# Altium PCB ctrl_lumier_pcb_backup.PcbDoc
Units mil, origin at the board's own origin, x right, y up, seen from the top; angles counter-clockwise.
Board outline 3525 x 2000 mil, 2 copper layers (Top Layer, Bottom Layer); 32 components, 42 nets, 150 pads, 42 vias.
Unrouted connection lines stored in the file: 21.
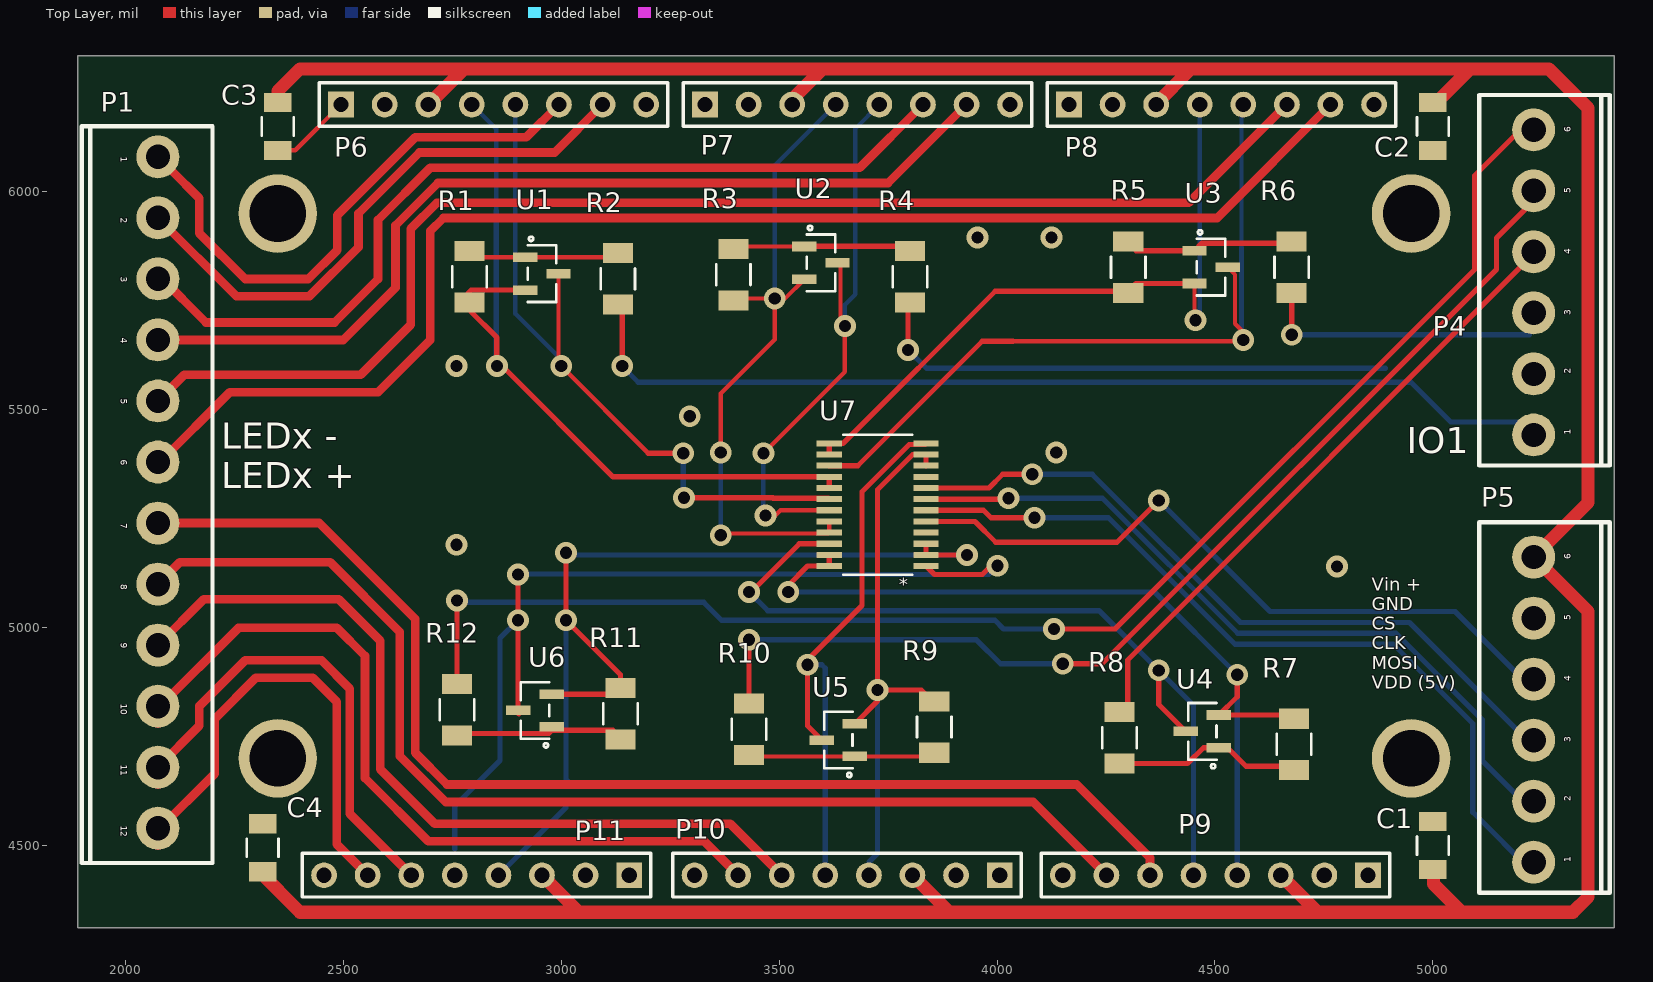
[diagram p0: Top Layer view]
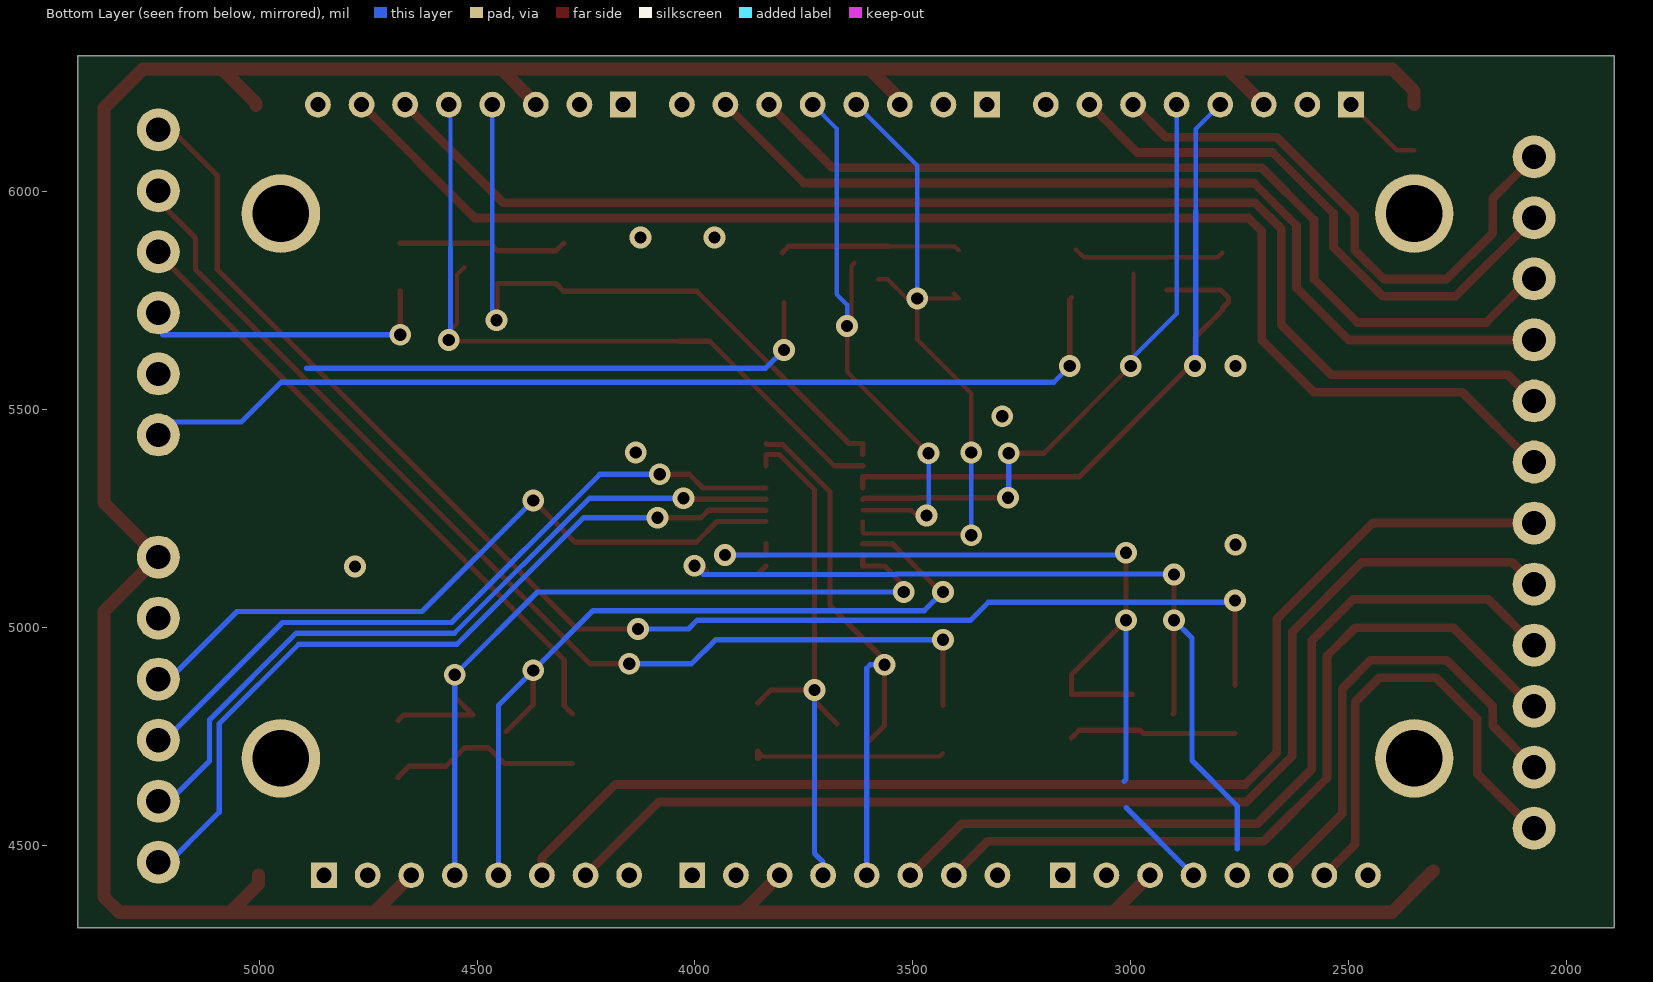
[diagram p1: Bottom Layer view, seen from below]

## Layer stack, top to bottom
Top Solder: solder mask 0.4, Solder Resist, Dk 3.5
Top Layer: signal copper 1.4
Dielectric 1: dielectric 12.6, FR-4, Dk 4.8
Bottom Layer: signal copper 1.4
Bottom Solder: solder mask 0.4, Solder Resist, Dk 3.5

## Board outline
1891,4312 1891,6312 5416,6312 5416,4312

## Design rules (kind name [scope] priority, off if disabled: settings)
Clearance [All] p1: gap=10 ignorepadtopadclearanceinfootprint=FALSE
ComponentClearance [All] p1: gap=0 collisioncheckmode=3 verticalgap=0 showdistances=FALSE
HoleSize [All] p1: absolutevalues=TRUE maxlimit=160 minlimit=1 maxpercent=80.000 minpercent=20.000
PolygonConnect PolygonConnect_5 [All vs IsNamedPolygon('GND_L02_P002')] p1: thpad.connectstyle=Direct thpad.reliefconductorwidth=10 thpad.reliefentries=4 thpad.polygonreliefangle="90 Angle" thpad.airgapwidth=10 smdpad.connectstyle=Direct smdpad.reliefconductorwidth=10 smdpad.reliefentries=4 smdpad.polygonreliefangle="90 Angle" smdpad.airgapwidth=10 via.connectstyle=Relief via.reliefconductorwidth=10 via.reliefentries=4 via.polygonreliefangle="90 Angle" via.airgapwidth=10
PolygonConnect PolygonConnect_4 [All vs IsNamedPolygon('GND_L01_P000')] p2: thpad.connectstyle=Direct thpad.reliefconductorwidth=10 thpad.reliefentries=4 thpad.polygonreliefangle="90 Angle" thpad.airgapwidth=10 smdpad.connectstyle=Direct smdpad.reliefconductorwidth=10 smdpad.reliefentries=4 smdpad.polygonreliefangle="90 Angle" smdpad.airgapwidth=10 via.connectstyle=Relief via.reliefconductorwidth=10 via.reliefentries=4 via.polygonreliefangle="90 Angle" via.airgapwidth=10
PolygonConnect PolygonConnect_3 [All vs IsNamedPolygon('GND_L01_P000')] p3: thpad.connectstyle=Direct thpad.reliefconductorwidth=10 thpad.reliefentries=4 thpad.polygonreliefangle="90 Angle" thpad.airgapwidth=10 smdpad.connectstyle=Relief smdpad.reliefconductorwidth=10 smdpad.reliefentries=4 smdpad.polygonreliefangle="90 Angle" smdpad.airgapwidth=10 via.connectstyle=Relief via.reliefconductorwidth=10 via.reliefentries=4 via.polygonreliefangle="90 Angle" via.airgapwidth=10
PolygonConnect PolygonConnect_2 [All vs IsNamedPolygon('GND_L01_P000')] p4: thpad.connectstyle=Direct thpad.reliefconductorwidth=10 thpad.reliefentries=4 thpad.polygonreliefangle="90 Angle" thpad.airgapwidth=10 smdpad.connectstyle=Direct smdpad.reliefconductorwidth=10 smdpad.reliefentries=4 smdpad.polygonreliefangle="90 Angle" smdpad.airgapwidth=10 via.connectstyle=Relief via.reliefconductorwidth=10 via.reliefentries=4 via.polygonreliefangle="90 Angle" via.airgapwidth=10
PolygonConnect PolygonConnect_1 [All vs IsNamedPolygon('GND_L01_P000')] p5: thpad.connectstyle=Direct thpad.reliefconductorwidth=10 thpad.reliefentries=4 thpad.polygonreliefangle="90 Angle" thpad.airgapwidth=10 smdpad.connectstyle=Direct smdpad.reliefconductorwidth=10 smdpad.reliefentries=4 smdpad.polygonreliefangle="90 Angle" smdpad.airgapwidth=10 via.connectstyle=Relief via.reliefconductorwidth=10 via.reliefentries=4 via.polygonreliefangle="90 Angle" via.airgapwidth=10
PolygonConnect [All] p6: connectstyle=Relief reliefconductorwidth=10 reliefentries=4 polygonreliefangle="90 Angle" airgapwidth=10
RoutingVias [All] p1: holewidth=25 width=40 viastyle="Through Hole" minholewidth=28 minwidth=50 maxholewidth=28 maxwidth=50
SilkToSilkClearance [All] p1: silktosilkclearance=0
SolderMaskExpansion [All] p1: expansion=4
UnRoutedNet [All] p1: checkbadconnections=TRUE
Width [All] p1: maxlimit=30 minlimit=8 preferedwidth=10
26 further rules are at their usual default settings.

## Components (designator, comment, footprint, x,y, rotation, side; value= is the part's Value field where it differs from the comment)
C1 "CapSMD" CC1206N 5000,4500 r270 top value=0.1u
C2 "CapSMD" CC1206N 5000,6150 r90 top value=0.1u
C3 "CapSMD" CC1206N 2350,6150 r90 top value=0.1u
C4 "CapSMD" CC1206N 2315,4495 r270 top value=0.1u
P1 "Header 12" "TERMINAL BLOCK 12 POS" 2200,6150 r270 top
P4 "Header 6" "TERMINAL BLOCK 6 POS" 5106,5377 r90 top
P5 "Header 6" "TERMINAL BLOCK 6 POS" 5106,4397 r90 top
P6 "Header 8" HDR1X8 2495,6200 r0 top
P7 "Header 8" HDR1X8 3330,6200 r0 top
P8 "Header 8" HDR1X8 4165,6200 r0 top
P9 "Header 8" HDR1X8 4851,4432 r180 top
P10 "Header 8" HDR1X8 4006,4432 r180 top
P11 "Header 8" HDR1X8 3156,4432 r180 top
R1 "ResSMD" STA_RMCF1206 2790,5805 r270 top
R2 "ResSMD" STA_RMCF1206 3130,5800 r90 top
R3 "ResSMD" STA_RMCF1206 3395,5810 r270 top
R4 "ResSMD" STA_RMCF1206 3800,5805.12 r90 top
R5 "ResSMD" STA_RMCF1206 4301,5827 r270 top
R6 "ResSMD" STA_RMCF1206 4676,5827 r90 top
R7 "ResSMD" STA_RMCF1206 4681,4732 r90 top
R8 "ResSMD" STA_RMCF1206 4281,4747 r270 top
R9 "ResSMD" STA_RMCF1206 3856,4772 r90 top
R10 "ResSMD" STA_RMCF1206 3431,4767 r270 top
R11 "ResSMD" STA_RMCF1206 3136,4802 r90 top
R12 "ResSMD" STA_RMCF1206 2761,4812 r270 top
U1 "MMBT3906LT1G" SOT-23 2956,5812 r270 top
U2 "MMBT3906LT1G" SOT-23 3596,5837 r270 top
U3 "MMBT3906LT1G" SOT-23 4491,5827 r270 top
U4 "MMBT3906LT1G" SOT-23 4471,4762 r90 top
U5 "MMBT3906LT1G" SOT-23 3636,4742 r90 top
U6 "MMBT3906LT1G" SOT-23 2940,4810 r90 top
U7 "AD5206BRUZ10-RL7" RU_24 3726,5282 r180 top

## Footprints (in the part's own frame and the unit in brackets; to place one, negate y for a bottom-side part, rotate by r counter-clockwise, add the part's x,y. Pads: shape width x height; smd on the part's side, far side on the other; paste and mask are expansions set on the pad)
CC1206N [mil]
  rect 44x63 smd paste+0 mask+0: 1(-55,0) 2(55,0)
  silkscreen extent -21,-37 21,37
HDR1X8 [mm] "Connector; Header; 8 Position"
  rect 1.5x1.5 hole 0.889: 1(0,0)
  round 1.5 hole 0.889: 2(2.54,0) 3(5.08,0) 4(7.62,0) 5(10.16,0) 6(12.7,0) 7(15.24,0) 8(17.78,0)
  silkscreen extent -1.27,-1.27 19.05,1.27
RU_24 [mil]
  rect 58x14 smd: 1(-111,140.75) 2(-111,115.16) 3(-111,89.57) 4(-111,63.98) 5(-111,38.39) 6(-111,12.8) 7(-111,-12.8) 8(-111,-38.39) 9(-111,-63.98) 10(-111,-89.57) 11(-111,-115.16) 12(-111,-140.75) 13(111,-140.75) 14(111,-115.16) 15(111,-89.57) 16(111,-63.98) 17(111,-38.39) 18(111,-12.8) 19(111,12.8) 20(111,38.39) 21(111,63.98) 22(111,89.57) 23(111,115.16) 24(111,140.75)
  silkscreen extent -79,-160 79,160
SOT-23 [mil]
  rect 22x56 smd: 1(-37.5,-38) 2(37.5,-38) 3(0,38)
  silkscreen extent -85,-33 65,33
STA_RMCF1206 [mil]
  rect 46x69 smd paste+0 mask+0: 1(-59,0) 2(59,0)
  silkscreen extent -24,-40 24,40
"TERMINAL BLOCK 6 POS" [mm]
  round 2.5 hole 1.422: 1(1.651,-3.175) 2(5.207,-3.175) 3(8.763,-3.175) 4(12.319,-3.175) 5(15.875,-3.175) 6(19.431,-3.175)
  silkscreen extent -0.13,-7.62 21.46,0
"TERMINAL BLOCK 12 POS" [mm]
  round 2.5 hole 1.422: 1(1.778,-3.175) 2(5.334,-3.175) 3(8.89,-3.175) 4(12.446,-3.175) 5(16.002,-3.175) 6(19.558,-3.175) 7(23.114,-3.175) 8(26.67,-3.175) 9(30.226,-3.175) 10(33.782,-3.175) 11(37.338,-3.175) 12(40.894,-3.175)
  silkscreen extent 0,-7.62 42.93,0

## Part data
C1 C2 C3 C4: "Capacitor", Package=1206, Voltage=50V, Type=Ceramic
P1: "Header, 12-Pin", LatestRevisionDate=17-Jul-2002, LatestRevisionNote="Re-released for DXP Platform.", Publisher="Altium Limited"
P4 P5: "Header, 6-Pin", LatestRevisionDate=17-Jul-2002, LatestRevisionNote="Re-released for DXP Platform.", Publisher="Altium Limited"
P6 P7 P8 P9 P10 P11: "Header, 8-Pin", LatestRevisionDate=17-Jul-2002, LatestRevisionNote="Re-released for DXP Platform.", Publisher="Altium Limited"
R1 R2 R3 R4 R5 R6 R7 R8 R9 R10 R11 R12: Package=1206
U1 U2 U3 U4 U5 U6: Built_By=EMA_UL_Team, C="Copyright (C) 2015 Accelerated Designs. All rights reserved", Manufacturer_Part_Number=MMBT3906LT1G, Vendor="ON Semiconductor"
U7: Built_By=EMA_UL_Team, C="Copyright (C) 2015 Accelerated Designs. All rights reserved", Manufacturer_Part_Number=AD5206BRUZ10-RL7, Vendor="Analog Devices Inc"

## Free pads (board coordinates)
  round 180 hole 130: ""(2350,4700) ""(2350,5950) ""(4950,4700) ""(4950,5950)

## Via types
v1: diameter 50, hole 28, Top Layer to Bottom Layer, 42 vias

## Nets (pads, with @x,y where several pads share a name; then routed paths per layer and width w, separated by ;. In a path a pad name is that pad's centre, name@x,y a point inside that pad or via, vN(x,y) a via of type N, cw(c..) or ccw(c..) an arc to the next point about the centre after c; other vN are vias at no path point)
CLK: P5.3 U7.8 | length 1676
  Top Layer w12: U7.8 3981.4,5320.39 4013.02,5352 v1(4081,5352)
  Bottom Layer w12: v1(4081,5352) 4218.23,5352 4558.23,5012 4946,5012 5231,4727 P5.3@5231,4717
CS: P5.4 U7.5 | length 1633.7
  Top Layer w12: U7.5 3949.39,5243.61 3997,5196 4275,5196 v1(4371,5292)
  Bottom Layer w12: v1(4371,5292) 4626,5037 5051,5037 P5.4@5231,4857
Ctrl_LED_1: P6.5 U1.3 U7.18 | length 1646.5
  Top Layer w10: v1@2994,5594 U1.3 ; v1(3000,5600) 3200,5400
  Top Layer w12: 3200,5400 v1(3280,5400) ; v1(3282,5298) 3485.48,5298 3486.48,5297 3612.8,5297 U7.18
  Bottom Layer w10: P6.5 2895,5720 v1@3000,5615
  Bottom Layer w12: v1(3280,5400) 3280,5300 v1(3282,5298)
Ctrl_LED_2: P7.5 U2.3 U7.19 | length 1358.6
  Top Layer w10: v1(3464,5400) 3651,5587 v1(3651,5692) 3641,5702 3641,5830 U2.3 ; v1(3468.5,5257) 3491,5257 3503.2,5269.2 U7.19
  Bottom Layer w10: v1(3464,5400) 3464,5261.5 v1(3468.5,5257) ; v1(3651,5692) 3651,5741 3675,5765 3675,6145 P7.5
Ctrl_LED_3: P8.5 U3.3 U7.15 | length 1791.4
  Top Layer w10: 4036,5657 4562,5657 v1(4565,5660) 4565,5678 4546,5697 4546,5810 U3.3
  Top Layer w12: U7.15 3680.57,5371.57 3966,5657 4036,5657
  Bottom Layer w10: 4561,5872 P8.5@4561,6200
  Bottom Layer w12: v1@4561,5660 4561,5872
Ctrl_LED_4: P9.5 U4.3 U7.22 | length 1913.1
  Top Layer w12: v1(3431,5082) 3436,5082 3546.43,5192.43 U7.22 ; v1(4371,4902) 4371,4824 U4.3
  Bottom Layer w12: v1(3431,5082) 3474,5039 4234,5039 v1(4371,4902) 4451,4822 P9.5
Ctrl_LED_5: P10.5 U5.3 U7.12 | length 1317.4
  Top Layer w12: U5.3 3565,4775 v1(3565,4915) 3565,4926 3690,5051 3690,5311.61 3798.54,5420.16 3834.41,5420.16 U7.12
  Bottom Layer w12: v1(3565,4915) 3598,4915 3606,4907 3606,4462
Ctrl_LED_6: P11.5 U6.3 U7.1 | length 2220.3
  Top Layer w12: v1@2896,5117 v1(2901,5122) v1(2901,5017) 2901,4804 U6.3@2903,4802 ; U7.1 3856.25,5122 3966,5122 3986,5142 v1(4001,5142)
  Bottom Layer w12: 2756,4492 2756,4591 2860,4695 2860,4976 v1(2901,5017) ; v1(2901,5122) 2893,5122 2892,5123 3537.98,5123 3538.98,5122 3981,5122 v1(4001,5142)
Gnd: C1.1 C2.1 C3.1 C4.1 P5.5 P6.1 P7.1 P8.1 P9.1 P10.1 P11.1 U7.4 U7.9 | length 188.5
  Top Layer w10: C3.1 2390,6095 P6.1
  other v1: 4780,5140 2760,5190 4136,5402 3295,5485 2760,5600 3955,5895 4125,5895
IO1: P4.1 R2.1 | length 2302.6
  Top Layer w12: R2.1@3136,5756.88 3140,5752.88 v1(3140,5600)
  Bottom Layer w12: v1(3140,5600) 3177,5563 4950,5563 5041,5472 P4.1@5231,5472
IO2: P4.2 R4.1 | length 1221.5
  Top Layer w12: v1(3796,5637) R4.1@3796,5746.12
  Bottom Layer w12: v1(3796,5637) 3838,5595 4891,5595
IO3: P4.3 R6.1 | length 666.4
  Top Layer w12: v1(4676,5672) 4676.24,5672 4676,5672.24 R6.1 R6.1@4676,5771.88
  Bottom Layer w12: v1(4676,5672) 5221,5672 ; P4.3@5216,5737 P4.3@5231,5752
IO4: P4.4 R8.1 | length 1483.4
  Top Layer w12: R8.1@4281,4802.12 4299.84,4820.95 4299.84,4925.84 5231,5857 P4.4 P4.4@5231,5892
IO5: P4.5 R10.1 | length 2507.7
  Top Layer w12: R10.1@3431,4822.12 R10.1 v1(3431,4972) ; v1(4151,4917) 4241,4917 5146,5822 5146,5893.57 5231,5978.57 P4.5 P4.5@5231,6032
  Bottom Layer w12: v1(3431,4972) 3953,4972 4008,4917 v1(4151,4917)
IO6: P4.6 R12.1 | length 3304.5
  Top Layer w12: R12.1@2761,4867.12 R12.1 v1(2761,5062) ; v1(4131,4997) 4271,4997 5096,5822 5096,6037 P4.6@5231,6172
  Bottom Layer w12: v1(2761,5062) 2765,5058 3327,5058 3368,5017 3995,5017 4015,4997 v1(4131,4997)
LED+1: P1.2 P6.7 | length 1322.2
  Top Layer w20: P1.2 2255,5760 2422.43,5760 2535,5872.57 2535,5950 2675,6090 2985,6090 P6.7
LED+2: P1.4 P7.7 | length 2156.2
  Top Layer w20: P1.4@2085,5650 2095,5660 2500,5660 2620,5780 2620,5922.43 2717.57,6020 3750,6020 P7.7
LED+3: P1.6 P8.7 | length 3174.6
  Top Layer w20: P1.6@2077.5,5377.5 2240,5540 2580,5540 2700,5660 2700,5910 2730,5940 4505,5940 P8.7
LED+4: P1.8 P9.7 | length 2660.7
  Top Layer w20: P1.8 2125,5150 2470,5150 2630,4990 2630,4705.56 2735.56,4600 4083,4600 P9.7
LED+5: P1.10 P10.7 | length 1841.9
  Top Layer w20: P1.10@2075,4780 2075,4815 2260,5000 2485,5000 2550,4935 2550,4655 2695,4510 3328,4510 P10.7
LED+6: P1.12 P11.7 | length 1113.7
  Top Layer w20: P1.12@2075,4500 2075,4535 2205,4665 2205,4790.49 2299.51,4885 2430,4885 2485,4830 2485,4503 P11.7
LED-1: P1.1 P6.6 | length 1253
  Top Layer w20: P1.1@2105,6050 2170,5985 2170,5905 2275,5800 2420,5800 2486,5866 2486,5946 2665,6125 2920,6125 P6.6
LED-2: P1.3 P7.6 | length 2079.7
  Top Layer w20: P1.3@2080,5805 2185,5700 2480,5700 2580,5800 2580,5935 2700,6055 3685,6055 P7.6
LED-3: P1.5 P8.6 | length 3000.5
  Top Layer w20: P1.5 2135,5580 2540,5580 2655,5695 2655,5915 2715,5975 4440,5975 P8.6
LED-4: P1.7 P9.6 | length 2814
  Top Layer w20: P1.7 2445,5240 2665,5020 2665,4712.98 2737.98,4640 4183,4640 4351,4472 P9.6
LED-5: P1.9 P10.6 | length 1909.5
  Top Layer w20: P1.9 2180,5065 2490,5065 2585,4970 2585,4675 2710,4550 3388,4550 P10.6
LED-6: P1.11 P11.6 | length 1121.2
  Top Layer w20: P1.11@2075,4640 P1.11 2170,4775 2170,4820 2275,4925 2450,4925 2515,4860 2515,4573 P11.6
MOSI: P5.2 U7.7 | length 1748.3
  Top Layer w12: U7.7 4023.8,5294.8 v1(4026,5297)
  Bottom Layer w12: v1(4026,5297) 4242.11,5297 4552.11,4987 4915.11,4987 5113.63,4788.49 5113.63,4694.37 P5.2@5231,4577
NetR1_1: R1.1 R2.2 U1.1 | length 347.7
  Top Layer w10: R1.1@2790,5860.12 2800.62,5849.5 U1.1 3108.26,5849.5 R2.2@3126,5867.24
NetR3_1: R3.1 R4.2 U2.1 | length 418.1
  Top Layer w10: R3.1@3395,5865.12 3404.38,5874.5 U2.1
  Top Layer w12: U2.1@3555,5875 3785,5875 R4.2@3800,5860
NetR5_1: R5.1 R6.2 U3.1 | length 389.6
  Top Layer w12: R5.1@4301,5882.12 4318.62,5864.5 U3.1 4470.62,5882.12 R6.2@4676,5882.12
NetR7_1: R7.1 R8.2 U4.1 | length 443.1
  Top Layer w12: R8.2 4437,4688 4473.5,4724.5 U4.1 4528.5,4724.5 4571,4682 4655.88,4682 R7.1@4681,4656.88
NetR9_1: R9.1 R10.2 U5.1 | length 452.2
  Top Layer w10: R10.2@3431,4711.88 3438.38,4704.5 U5.1 3843.62,4704.5 R9.1@3856,4716.88
  Top Layer w12: R9.1@3853.88,4700 3856,4700 R9.1 R9.1@3856,4716.88
NetR11_1: R11.1 R12.2 U6.1 | length 385.5
  Top Layer w12: R12.2@2761,4756.88 2971.38,4756.88 2979,4764.5 3118.38,4764.5 R11.1@3136,4746.88
Ref_LED_1: P6.4 R1.2 U1.2 U7.16 U7.17 | length 1855
  Top Layer w12: U1.2 2793.62,5774.5 2776,5756.88 2776,5747 2790,5733 2790,5728 2852.5,5665.5 v1(2852.5,5600) 2865,5600 3119.02,5345.98 U7.16 U7.17
  Bottom Layer w10: P6.4 2851,6144 2851,5957
  Bottom Layer w12: 2851,5957 2851,5601.5 v1(2852.5,5600)
Ref_LED_2: P7.4 R3.2 U2.2 U7.20 U7.21 | length 1593.6
  Top Layer w10: v1(3366,5212) 3370,5216 3612.98,5216 U7.21 U7.20 ; v1(3366,5402) 3366,5537 3490,5661 v1(3490,5755) ; R3.2@3406.44,5766.44 3395,5755 v1(3490,5755) ; U2.2@3579.5,5799.5 U2.2 3513.5,5755 v1(3490,5755)
  Bottom Layer w10: v1(3366,5212) v1(3366,5402) ; v1(3490,5755) 3490,6060 P7.4
Ref_LED_3: P8.4 R5.2 U3.2 U7.13 U7.14 | length 1600
  Top Layer w10: U3.2 4453,5707 v1(4455,5705)
  Top Layer w12: U7.14 U7.13 3646.75,5422.75 3995.88,5771.88 4301,5771.88 4318.62,5789.5 U3.2
  Bottom Layer w10: v1(4455,5705) 4465,5715 P8.4
Ref_LED_4: P9.4 R7.2 U4.2 U7.23 U7.24 | length 2008.6
  Top Layer w12: v1(3521,5082) 3521,5097 3565.25,5141.25 U7.24 U7.23 ; v1(4551,4892) 4551,4841.5 U4.2 4668.62,4799.5 R7.2@4681,4787.12
  Bottom Layer w12: v1(3521,5082) 4361,5082 v1(4551,4892) P9.4
Ref_LED_5: P10.4 R9.2 U5.2 U7.10 U7.11 | length 1271.2
  Top Layer w12: U5.2 3726,4831.5 v1(3726,4857) 3826.12,4857 R9.2@3856,4827.12 ; v1@3726,4860 3726,5316.5 3806.66,5397.16 U7.11 U7.10
  Bottom Layer w12: 3706,4462 3726,4482 v1(3726,4857)
Ref_LED_6: P11.4 R11.2 U6.2 U7.2 U7.3 | length 2152
  Top Layer w12: U6.2@2996.62,4847.12 3136,4847.12 R11.2 3136,4892 v1(3011,5017) v1(3011,5172) ; U7.3 U7.2 v1(3930.84,5166.84)
  Bottom Layer w12: P11.4 3011,4587 ; v1(3011,5017) 3011,4652 3016,4647 ; v1(3011,5172) 3011,5167 3010.84,5166.84 v1(3930.84,5166.84)
VDD: P5.1 U7.6 | length 1857.6
  Top Layer w12: U7.6 3968.8,5269.2 3986,5252 v1(4086,5252)
  Bottom Layer w12: v1(4086,5252) 4256,5252 4546,4962 4909,4962 5091.63,4779.37 5091.63,4576.37 P5.1@5231,4437
Vin+: C1.2 C2.2 C3.2 C4.2 P5.6 P6.3 P7.3 P8.3 P9.3 P10.3 P11.3 | length 9043.3
  Top Layer w30: C4.2@2306,4441.88 2400.88,4347 3041,4347 ; C3.2@2350,6200 C3.2 2350,6231.24 2400.76,6282 2775,6282 ; P6.3 2775,6280 2775,6282 ; P11.3 3041,4347 ; P7.3 3530,6212 3600,6282 ; P10.3 3891,4347 ; P8.3 4365,6202 4445,6282 ; P9.3 4736,4347 ; C1.2@5001,4431.88 5001,4412 5066,4347 ; C2.2@5006.94,6198.06 5006.94,6202.94 5086,6282 ; 2775,6282 3600,6282 ; 3041,4347 3891,4347 ; 3600,6282 4445,6282 ; 3891,4347 4736,4347 ; 4445,6282 5086,6282 ; 4736,4347 5066,4347 ; 5066,4347 5321,4347 5356,4382 5356,5037 P5.6 5356,5287 5356,6192 5266,6282 5086,6282
pads on no net: P6.2 P6.8 P7.2 P7.8 P8.2 P8.8 P9.2 P9.8 P10.2 P10.8 P11.2 P11.8

## Silkscreen, mask and mechanical layers (free items; w line width, h text height)
Top Overlay:
  text "IO1" at 4940,5400 h60
  text "LEDx - / LEDx +" at 2220,5320 h60
  text "Vin + / GND / CS / CLK / MOSI / VDD (5V)" at 4860,4860 h30
Mechanical 1:
  the board outline again, w10

## Text inside footprints (layer, text, board x,y; h text height)
P1: Top Overlay "1" at 1990,6080 h15 r270; Top Overlay "2" at 1990,5940 h15 r270; Top Overlay "3" at 1990,5805 h15 r270; Top Overlay "4" at 1990,5665 h15 r270; Top Overlay "5" at 1990,5525 h15 r270; Top Overlay "6" at 1990,5385 h15 r270; Top Overlay "12" at 1990,4545 h15 r270; Top Overlay "11" at 1990,4685 h15 r270; Top Overlay "10" at 1990,4825 h15 r270; Top Overlay "9" at 1990,4965 h15 r270; Top Overlay "8" at 1990,5100 h15 r270; Top Overlay "7" at 1990,5240 h15 r270
P4: Top Overlay "6" at 5316,6137 h15 r90; Top Overlay "5" at 5316,5997 h15 r90; Top Overlay "4" at 5316,5857 h15 r90; Top Overlay "3" at 5316,5717 h15 r90; Top Overlay "2" at 5316,5582 h15 r90; Top Overlay "1" at 5316,5442 h15 r90
P5: Top Overlay "6" at 5316,5157 h15 r90; Top Overlay "5" at 5316,5017 h15 r90; Top Overlay "4" at 5316,4877 h15 r90; Top Overlay "3" at 5316,4737 h15 r90; Top Overlay "2" at 5316,4602 h15 r90; Top Overlay "1" at 5316,4462 h15 r90
U7: Top Overlay "*" at 3796,5127 h31.25 r180